# Altium PCB logi-edu.PcbDoc
Units mil, origin at the board's own origin, x right, y up, seen from the top; angles counter-clockwise.
Board outline 3607 x 2026 mil, 4 copper layers (Top Layer, Mid-Layer 1, Mid-Layer 2, Bottom Layer); 57 components, 59 nets, 300 pads, 107 vias.
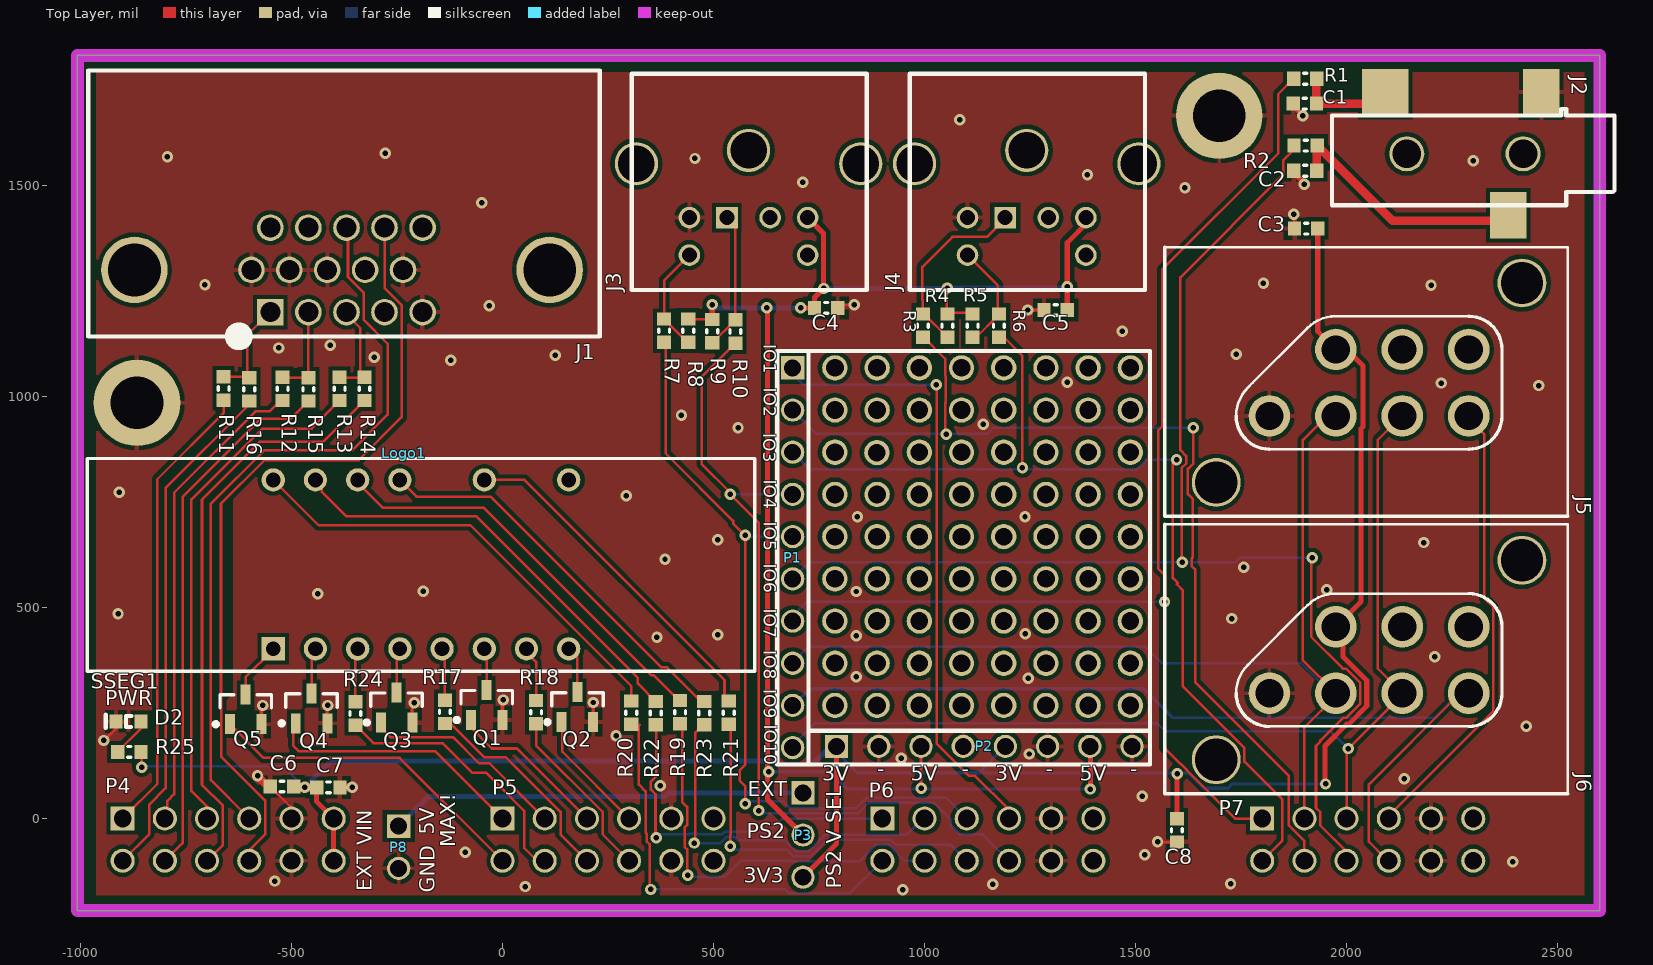
[diagram p0: Top Layer view]
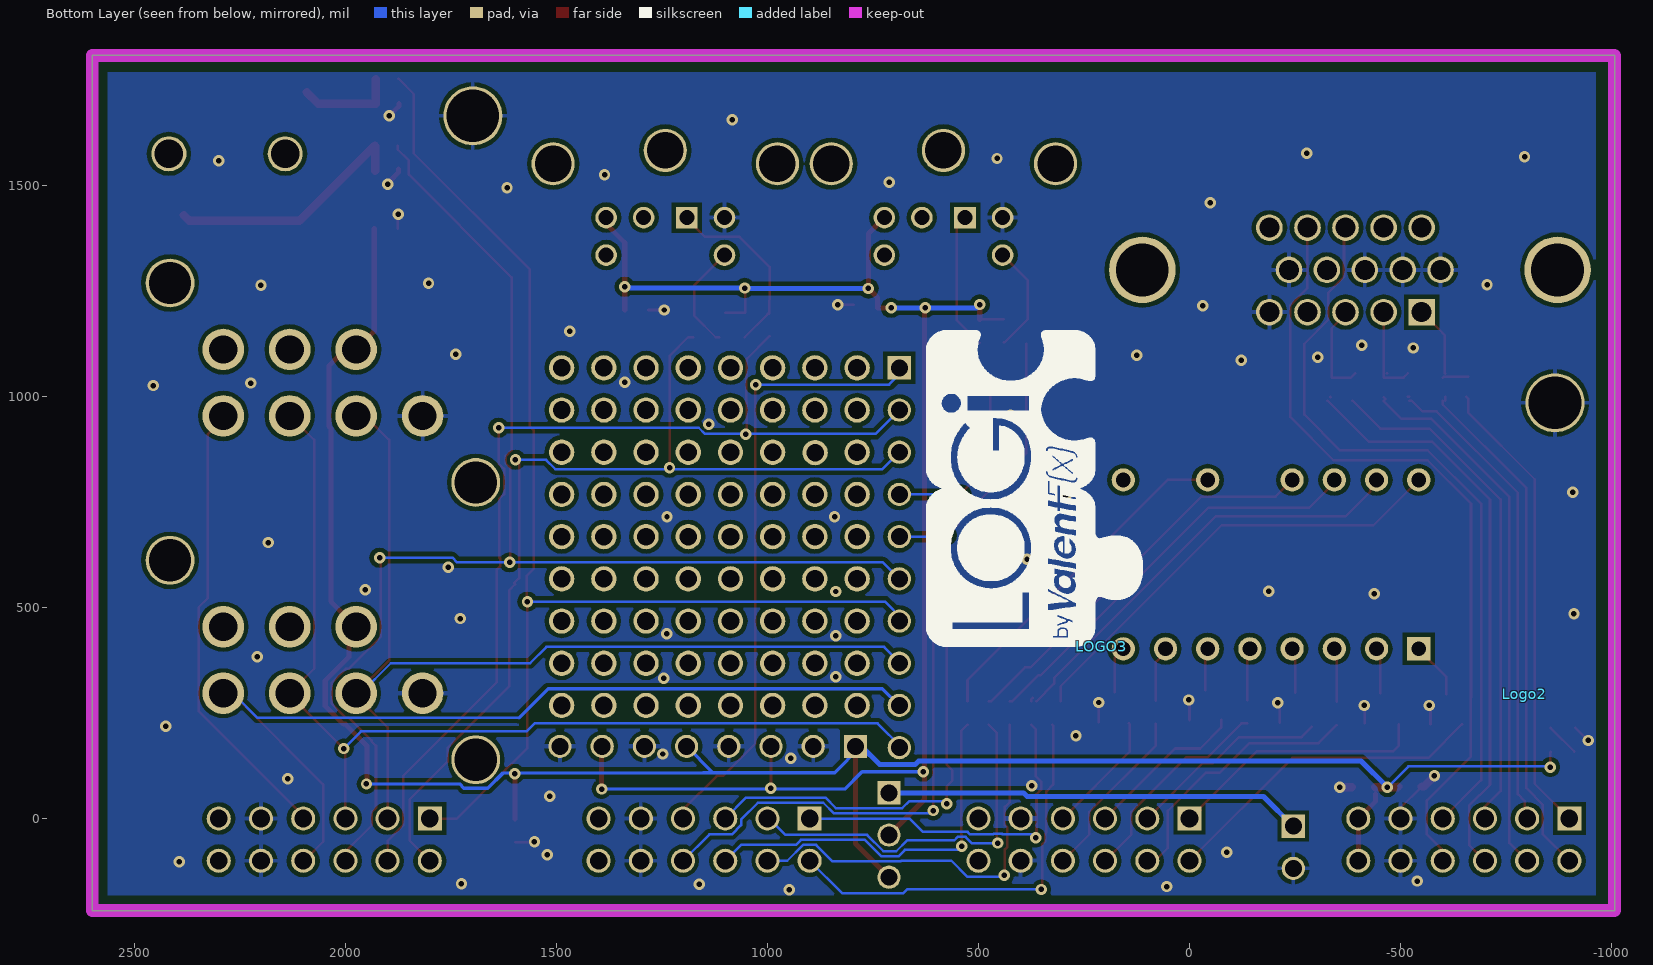
[diagram p1: Bottom Layer view, seen from below]
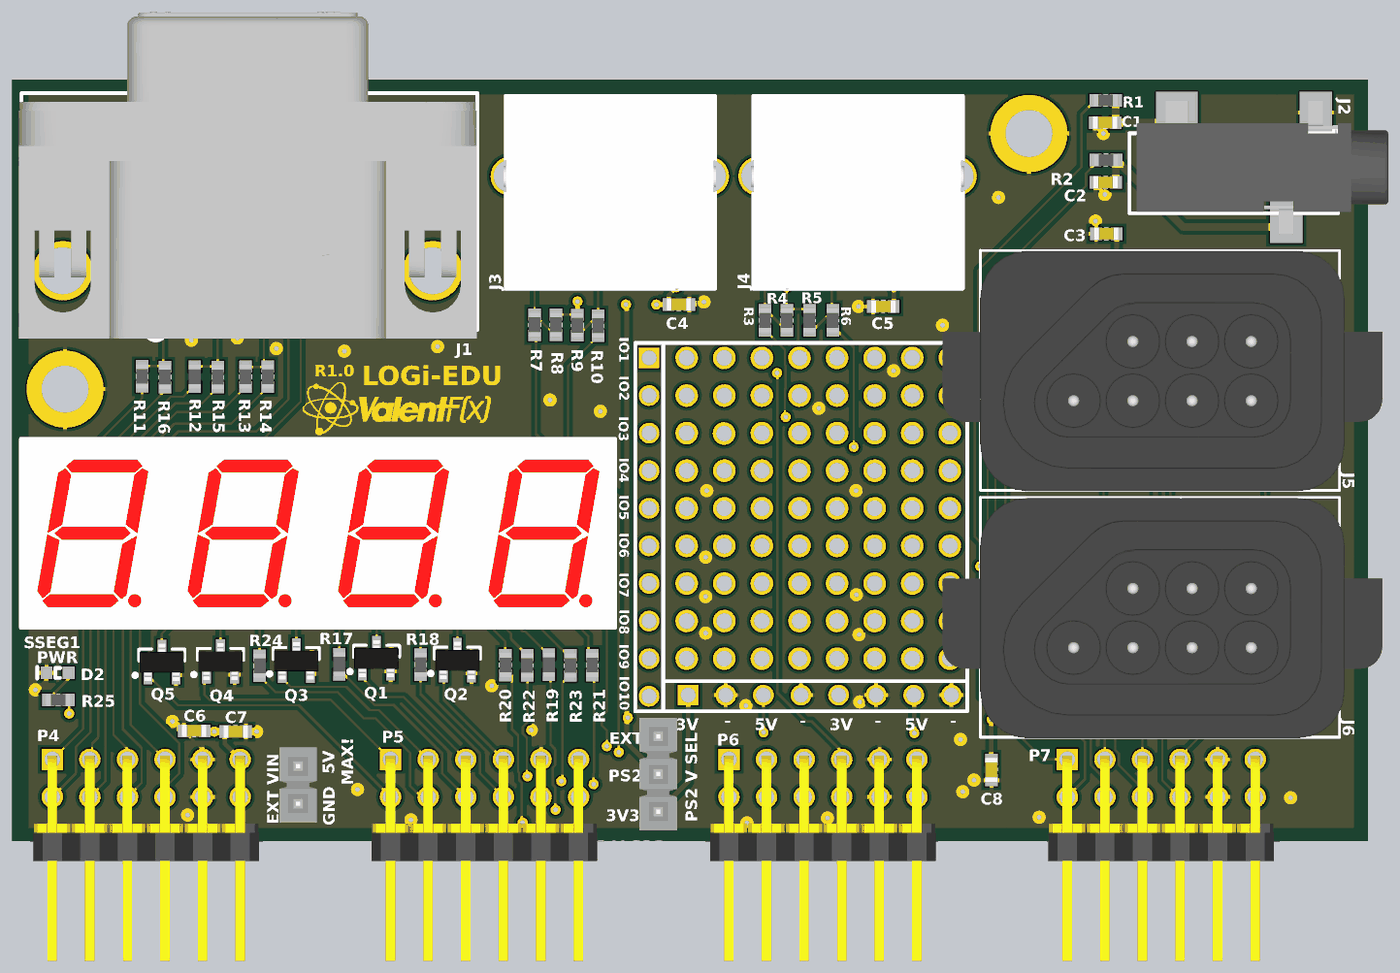
[diagram p2: 3D render of the assembled board from above, using the file's embedded part models]

## Layer stack, top to bottom
Top Solder: solder mask 0.4, Solder Resist, Dk 3.5
Top Layer: signal copper 1.4
Dielectric1: dielectric 12.6, FR-4, Dk 4.8
Mid-Layer 1: signal copper 1.4
Dielectric2: dielectric 12.6, FR-4, Dk 4.8
Mid-Layer 2: signal copper 1.4
Dielectric3: dielectric 12.6, FR-4, Dk 4.8
Bottom Layer: signal copper 1.4
Bottom Solder: solder mask 0.4, Solder Resist, Dk 3.5

## Board outline
-1007,-218 2600,-218 2600,1808 -1007,1808

## Design rules (kind name [scope] priority, off if disabled: settings)
Clearance Poly [InPoly] p1: gap=10
Clearance [All] p2: gap=6
ComponentClearance LEDS+Mounts [(HasFootprint('LTM-450')) vs (HasFootprint('LED T1-3/4 GREEN - 0.45" STANDOFF') OR HasFootprint('LED T1-3/4 RED -  0.45" STANDOFF'))] p1: gap=0 collisioncheckmode=3 verticalgap=0 showdistances=FALSE
ComponentClearance ComponentClearance_1 [OnLayer('Mechanical 1')] p2: gap=0 collisioncheckmode=3 verticalgap=0 showdistances=FALSE
ComponentClearance [All] p3: gap=10 collisioncheckmode=3 verticalgap=10 showdistances=FALSE
Height [All] p1: minheight=0 maxheight=1500 prefheight=500
HoleSize [All] p1: absolutevalues=TRUE maxlimit=250 minlimit=1 maxpercent=80.000 minpercent=20.000
HoleToHoleClearance [All] p1: gap=2 allowstackedmicrovias=TRUE
MinimumSolderMaskSliver [All] p1: minsoldermaskwidth=0
PlaneClearance [All] p1: clearance=10
PolygonConnect via [isvia] p1: connectstyle=Direct reliefconductorwidth=10 reliefentries=4 polygonreliefangle="90 Angle" airgapwidth=10
PolygonConnect PolygonConnect_1 [All] p2: connectstyle=Relief reliefconductorwidth=10 reliefentries=4 polygonreliefangle="90 Angle" airgapwidth=10
RoutingVias [All] p1: holewidth=13 width=27 viastyle="Through Hole" minholewidth=13 minwidth=27 maxholewidth=13 maxwidth=27
SilkToSilkClearance [All] p1: silktosilkclearance=0
SilkToSolderMaskClearance SilkscreenOverComponentPads [IsPad] p1: minsilkscreentomaskgap=0 clearancetoexposedcopper=TRUE
SolderMaskExpansion SolderMaskExpansion_1 [ISVIA] p1: expansion=-100
SolderMaskExpansion [All] p2: expansion=4
Width [All] p1: maxlimit=20 minlimit=6 preferedwidth=12
21 further rules are at their usual default settings.

## Classes and differential pairs
component class logi-edu-top: Logo1 LOGO2 Logo2 LOGO3 Screw1 Screw2 STDOFF1 STDOFF2
component class logi-edu: C1 C2 C3 C4 C5 C6 C7 C8 D2 J1 J2 J3 J4 J5 J6 P1 P2 P3 P4 P5 P6 P7 P8 Q1 Q2 Q3 Q4 Q5 R1 R2 R3 R4 R5 R6 R7 R8 R9 R10 R11 R12 R13 R14 R15 R16 R17 R18 R19 R20 R21 R22 R23 R24 R25 SSEG1
component class ANALOG_IO: C53

## Components (designator, comment, footprint, x,y, rotation, side; value= is the part's Value field where it differs from the comment)
C1 ".1uF" C0603 1901,1694 r180 top (schematic designator C10)
C2 ".1uF" C0603 1902,1535 r180 top (schematic designator C9)
C3 ".1uF" C0603 1904,1398 r180 top (schematic designator C8)
C4 ".1uF" C0603 767,1210 r180 top (schematic designator C5)
C5 ".1uF" C0603 1310.56,1205 r0 top (schematic designator C6)
C6 "4.7uF" C0603 -522.44,76 r180 top (schematic designator C1)
C7 ".1uF" C0603 -412.44,74 r0 top (schematic designator C2)
C8 ".1uF" C0603 1598,-28 r270 top (schematic designator C7)
D2 "598-8010-107F" "LED_0603 - RED" -886,230 r180 top
J1 "VGA" 1-1734530-1 -550,1200 r180 top locked
J2 "SJ-3523-SMT" SJ-3523-SMT 2556,1575 r0 top (schematic designator J6)
J3 "PS/2" "MD-60S - PS/2" 583,1335 r180 top (schematic designator J2)
J4 "PS/2" "MD-60S - PS/2" 1242,1335 r180 top (schematic designator J3)
J5 "450-32360" "NES - 450-32360" 1817,954 r90 top locked
J6 "450-32360" "NES - 450-32360" 1817,297 r90 top locked (schematic designator J4)
Logo1 "Valent Logo 500" VALENTFX_500-SolderMask -234,866 r0 top (schematic designator Logo4)
Logo2 "Valent Logo 1000" ValentFX_1000-SolderMask -793,295 r90 bottom (schematic designator Logo1)
LOGO3 "LOGI-750" LOGI-750-SILK 209,407 r90 bottom
P1 "Header10" "HEADER_10_40_100THRU SIP" 687.56,1068 r270 top (schematic designator P6)
P2 "Header8" "HEADER_8_40_100THRU SIP" 791.56,171 r0 top (schematic designator P5)
P3 "Header3 Male" "HDR - PRPC003SAAN-RC" 712,61 r270 top (schematic designator P8)
P4 "MTSW-106-07-G-D-130-RA" "PMOD HEADER - Male"#1 -900,0 r180 top locked (schematic designator P1)
P5 "MTSW-106-07-G-D-130-RA" "PMOD HEADER - Male"#2 250,-50 r180 top (schematic designator P2)
P6 "MTSW-106-07-G-D-130-RA" "PMOD HEADER - Male"#2 1150,-50 r180 top (schematic designator P3)
P7 "MTSW-106-07-G-D-130-RA" "PMOD HEADER - Male"#2 2050,-50 r180 top (schematic designator P4)
P8 "Header2 - Male" "HDR - PRPC002SAAN-RC" -246,-18 r270 top (schematic designator P7)
Q1 "DMN65D8L-7" SOT-23 -37.44,269 r90 top (schematic designator Q4)
Q2 "DMN65D8L-7" SOT-23 177.56,264 r90 top (schematic designator Q5)
Q3 "DMN65D8L-7" SOT-23 -251,263 r90 top
Q4 "DMN65D8L-7" SOT-23 -452.44,261 r90 top (schematic designator Q2)
Q5 "DMN65D8L-7" SOT-23 -608.44,259 r90 top (schematic designator Q1)
R1 "1k" R0603 1902,1753 r0 top (schematic designator R17)
R2 "1k" R0603 1903,1594.44 r0 top (schematic designator R16)
R3 "220" R0603 996,1168 r90 top (schematic designator R20)
R4 "10k" R0603 1054,1168 r90 top (schematic designator R18)
R5 "10k" R0603 1114,1168 r90 top (schematic designator R19)
R6 "220" R0603 1176,1168 r90 top (schematic designator R21)
R7 "220" R0603 383,1156 r90 top (schematic designator R25)
R8 "10k" R0603 440,1156 r90 top (schematic designator R23)
R9 "10k" R0603 497,1155 r90 top (schematic designator R22)
R10 "220" R0603 552,1154 r90 top (schematic designator R24)
R11 "100" R0603 -661,1019 r90 top (schematic designator R2)
R12 "100" R0603 -521,1018 r90 top (schematic designator R3)
R13 "100" R0603 -386,1018 r90 top (schematic designator R5)
R14 "220" R0603 -327,1018 r90 top (schematic designator R6)
R15 "220" R0603 -459.8,1017.06 r90 top (schematic designator R4)
R16 "220" R0603 -600,1017 r90 top (schematic designator R1)
R17 "100" R0603 -136.44,253 r270 top (schematic designator R14)
R18 "100" R0603 79.56,252 r270 top (schematic designator R15)
R19 "100" R0603 421,252 r270 top (schematic designator R11)
R20 "100" R0603 305,251 r270 top (schematic designator R7)
R21 "100" R0603 536,251 r270 top (schematic designator R12)
R22 "100" R0603 363,250 r270 top (schematic designator R9)
R23 "100" R0603 478,250 r270 top (schematic designator R10)
R24 "100" R0603 -348.44,249 r270 top (schematic designator R8)
R25 "220" R0603 -884,158 r0 top (schematic designator R13)
SSEG1 "7SEG" "LED - SSEG - LTC-4727JR" -543.2,402.33 r0 top locked

## Footprints (in the part's own frame and the unit in brackets; to place one, negate y for a bottom-side part, rotate by r counter-clockwise, add the part's x,y. Pads: shape width x height; smd on the part's side, far side on the other; paste and mask are expansions set on the pad)
1-1734530-1 [mm] "VGA DB15 HD connector female"
  rect 1.6x1.6 hole 1.2: 1(0,0)
  round 1.6 hole 1.2: 2(-2.29,0) 3(-4.58,0) 4(-6.87,0) 5(-9.16,0) 6(1.14,-2.54) 7(-1.14,-2.54) 8(-3.42,-2.54) 9(-5.7,-2.54) 10(-7.98,-2.54) 11(0,-5.08) 12(-2.29,-5.08) 13(-4.58,-5.08) 14(-6.87,-5.08) 15(-9.16,-5.08)
  round 4 hole 3.18: X(-16.81,-2.54) X(8.18,-2.54)
  silkscreen extent -19.82,-14.54 10.96,1.54, body extent -19.79,-20.01 11.16,2.04, height 12.25
C0603 [mm] "0603 Generic"
  rect 0.8x0.85 smd: 1(-0.7,0) 2(0.7,0)
  silkscreen extent -0.1,-0.33 0.1,0.33, body extent -0.8,-0.42 0.82,0.4, height 0.46
"HDR - PRPC002SAAN-RC" [mil]
  rect 55x55 hole 40: 1(0,0)
  round 55 hole 40: 2(100,0)
  body extent -50,-50 150,50, height 205
"HDR - PRPC003SAAN-RC" [mil]
  rect 55x55 hole 40: 1(0,0)
  round 55 hole 40: 2(100,0) 3(200,0)
  body extent -50,-50 250,50, height 205
"HEADER_8_40_100THRU SIP" [mil]
  rect 55x55 hole 40: 1(0,0)
  round 55 hole 40: 2(100,0) 3(200,0) 4(300,0) 5(400,0) 6(500,0) 7(600,0) 8(700,0)
"HEADER_10_40_100THRU SIP" [mil] "HEADER 100 MIL PITCH"
  rect 55x55 hole 40: 1(0,0)
  round 55 hole 40: 2(100,0) 3(200,0) 4(300,0) 5(400,0) 6(500,0) 7(600,0) 8(700,0) 9(800,0) 10(900,0)
"LED - SSEG - LTC-4727JR" [mil] "LED - SSEG - LTC-4727JR"
  rect 55x55 hole 35: 1(0,0)
  round 55 hole 35: 2(100,0) 3(200,0) 4(300,0) 5(400,0) 6(500,0) 7(600,0) 8(700,0) 9(700,400) 11(500,400) 13(300,400) 14(200,400) 15(100,400) 16(0,400)
  silkscreen extent -441,-53 1141,451, body extent -441,-53 1141,451, height 276
"LED_0603 - RED" [mm] "LED_0603"
  rect 0.8x0.85 smd: A(-0.75,0) C(0.75,0)
  silkscreen extent -0.18,-0.41 1.37,0.38, body extent -0.8,-0.4 0.8,0.4, height 0.75
LOGI-750-SILK [mil]
  silkscreen extent 0,-98 750,413
"MD-60S - PS/2" [mm]
  rect 1.3x1.3 hole 0.9: 1(1.3,-2.26)
  round 1.3 hole 0.9: 2(-1.3,-2.26) 3(3.56,-2.26) 4(-3.56,-2.26) 5(3.56,0) 6(-3.56,0)
  round 2.6 hole 2.2: x(-6.75,-5.5) x(0,-6.3) x(6.75,-5.5)
  silkscreen extent -7.11,-10.92 7.04,2.1, body extent -7.17,-11 7.17,2.1, height 13.3
"NES - 450-32360" [mm] "NES Controller Socket"
  round 2.5 hole 1.7: 1(0,0) 2(0,-4) 3(0,-8) 4(0,-12) 5(4,-12) 6(4,-8) 7(4,-4)
  round 2.94 hole 2.54 paste+0: 8(-4,3.2) 9(8,-15.2)
  silkscreen extent -6.04,-17.96 10.16,6.3, body extent -6.12,-20.85 10.13,8.86, height 17.61
"PMOD HEADER - Male"#1 [mil] "68021-212HLF"
  rect 57x57 hole 42: 1(0,0)
  round 57 hole 42: 2(-100,0) 3(-200,0) 4(-300,0) 5(-400,0) 6(-500,0) 7(0,100) 8(-100,100) 9(-200,100) 10(-300,100) 11(-400,100) 12(-500,100)
  body extent -550,-10 50,536, height 225
"PMOD HEADER - Male"#2 [mil] "68021-212HLF"
  rect 57x57 hole 42: 1(250,-50)
  round 57 hole 42: 2(150,-50) 3(50,-50) 4(-50,-50) 5(-150,-50) 6(-250,-50) 7(250,50) 8(150,50) 9(50,50) 10(-50,50) 11(-150,50) 12(-250,50)
  body extent -300,-60 300,486, height 225
R0603 [mm] "0603 Generic"
  rect 0.8x0.85 smd: 1(-0.7,0) 2(0.7,0)
  silkscreen extent -0.1,-0.33 0.1,0.33, body extent -0.81,-0.41 0.81,0.41, height 0.46
SJ-3523-SMT [mm] "3.5MM Stereo Audio Jack"
  rect 2.2x2.8 smd: 1(-2.4,3.7) 3(-4.4,-3.7)
  rect 2.8x2.8 smd: 2(-11.8,3.7)
  round 2.108 hole 1.727 unplated: H1(-3.5,0) H2(-10.5,0)
  silkscreen extent -15,-3.1 2,2.7, body extent -14.52,-4.5 2.48,4.5, height 5.04
SOT-23 [mm] "SOT-23"
  rect 1.2x0.6 smd: 1(-0.9,0.95) 2(-0.9,-0.95) 3(0.9,0)
  silkscreen extent -1.02,-1.55 0.87,1.92, body extent -1.27,-1.5 1.23,1.5, height 1.07
VALENTFX_500-SolderMask [mil]
ValentFX_1000-SolderMask [mil]

## Part data
C1 C2 C3 C4 C5 C7 C8: library part "C0603 - GRM188R71H104KA93D", "0.1uF 50volts X7R 10% MLCC SMD/SMT 0603"
C6: library part "C0603 - GRM188F51A475ZE20D", "4.7uF 10volts Y5V +80-20% (MLCC) - SMD/SMT 0603"
D2: library part "LED0603 - 598-8010-107F", "LED ALINGAP RED CLEAR 0603 SMD"
J1: library part "VGA - 1-1734530-1", "CONN HD D-SUB RCPT R/A 15POS"
J2: "CONN AUDIO JACK 3.5MM STEREO SMD"
J3 J4: library part "Con - D-60S", "CONN MINIDIN RECPT UNSHIELD 6POS - PS/2 mouse - keybaord"
J5 J6: "NES CONTROLLER SOCKET"
P1: "Header 10 pin"
P2: "Header 8 pin"
P3: library part "HDR - PRPC003SAAN-RC", "3POS Male CONN HEADER .100\" SNGL STR"
P4 P5 P6 P7: library part "P-MOD - MTSW-106-07-G-D-130-RA", "Samtec Male Conn Unshrouded Header HDR 12 POS 2.54mm Solder RA Thru-Hole"
P8: library part "HDR - PRPC002SAAN-RC", "2POS male CONN HEADER .100\" SNGL STR"
Q1 Q2 Q3 Q4 Q5: library part "NMOS - DMN65D8L-7", "MOSFET N-CH 60V 310MA SOT23"
R1 R2: library part ERJ-3EKF1001V, "RES 1.00K OHM 1/10W 1% 0603 SMD"
R3 R6 R7 R10 R14 R15 R16 R25: library part "R0603 - ERJ-3EKF2200V", "220 - thick Film Resistors - SMD 0603 220ohms 1% Tol"
R4 R5 R8 R9: library part "R0603 - CRCW060310K0FKEA", "10k Thick Film Resistors - SMD 1/10watt 10Kohms 1%"
R11 R12 R13 R17 R18 R19 R20 R21 R22 R23 R24: library part "R0603 - CRCW0603100RFKEA", "100 ohms 1% Thick Film Resistors - SMD 1/10watt"
SSEG1: library part "LED - SSEG - LTC-4727JR", "LED Displays & Accessories 4 Digit, Red Low Current"

## Free pads (board coordinates)
  round 205 / inner round 140 / far side round 140 hole 125: MT1(1698,1665) MT2(-866,985)
  round 60 hole 42: X(787.56,268) X(787.56,368) X(787.56,468) X(787.56,568) X(787.56,668) X(787.56,768) X(787.56,868) X(787.56,968) X(787.56,1068) X(887,867) X(887.56,268) X(887.56,368) X(887.56,468) X(887.56,568) X(887.56,668) X(887.56,768) X(887.56,968) X(887.56,1068) X(987.56,268) X(987.56,368) X(987.56,468) X(987.56,568) X(987.56,668) X(987.56,768) X(987.56,868) X(987.56,968) X(987.56,1068) X(1087.56,268) X(1087.56,368) X(1087.56,468) X(1087.56,568) X(1087.56,668) X(1087.56,768) X(1087.56,868) X(1087.56,968) X(1087.56,1068) X(1187.56,268) X(1187.56,368) X(1187.56,468) X(1187.56,568) X(1187.56,668) X(1187.56,768) X(1187.56,868) X(1187.56,968) X(1187.56,1068) X(1287.56,268) X(1287.56,368) X(1287.56,468) X(1287.56,568) X(1287.56,668) X(1287.56,768) X(1287.56,868) X(1287.56,968) X(1287.56,1068) X(1387.56,268) X(1387.56,368) X(1387.56,468) X(1387.56,568) X(1387.56,668) X(1387.56,768) X(1387.56,868) X(1387.56,968) X(1387.56,1068) X(1487.56,268) X(1487.56,368) X(1487.56,468) X(1487.56,568) X(1487.56,668) X(1487.56,768) X(1487.56,868) X(1487.56,968) X(1487.56,1068)

## Via types
v1: diameter 27, hole 13, Top Layer to Bottom Layer, 107 vias

## Nets (pads, with @x,y where several pads share a name; then routed paths per layer and width w, separated by ;. In a path a pad name is that pad's centre, name@x,y a point inside that pad or via, vN(x,y) a via of type N, cw(c..) or ccw(c..) an arc to the next point about the centre after c; other vN are vias at no path point)
3V3: C3.1 C6.1 C7.1 C8.1 J5.7 J6.7 P2.1 P2.5 P3.3 P4.6 P4.12 R25.2 | length 5174.9
  Top Layer w6: R25.2 -855,156.56 v1(-855,122)
  Top Layer w12: C7.1@-441,58.44 -441,41 P4.6 ; P4.6@-403.44,-5 -400,-8.44 P4.12 ; P3.3 791.56,-59.44 P2.1 ; C8.1 1598,105 v1(1599,106) ; C3.1 1931.56,1154.4 J5.7 ; v1@1948.56,82 1948.56,172 2000.35,223.79 2004.81,223.79 2047.69,266.67 2047.69,327.33 1991.56,383.46 J6.7@1991.56,442 ; J6.7 2034.56,514.56 2034.56,924.51 2038.69,928.65 2038.69,1072.87 J5.7@1991.56,1120
  Top Layer w20: C6.1 -492.88,74 v1(-468.94,74) C7.1
  Bottom Layer w6: v1(-855,122) -853.5,123.5 -518.44,123.5 v1(-468.94,74)
  Bottom Layer w8: P2.1@779.56,170 840.56,109 1129.56,109 ; P2.5 1129.56,109 ; v1(1950,82) 1729.48,82 1719.13,71.65 1662.9,71.65 1626.55,108 1152.77,108 1151.77,109 1129.56,109
  Bottom Layer w12: v1(-468.94,74) -406.44,136.5 641.56,136.5 650.06,128 734,128 777,171 P2.1
EXT_VIN: P3.1 P8.1 | length 990.7
  Bottom Layer w12: P8.1 -175.5,52.5 384.56,52.5 393.06,61 P3.1
GND: C1.2 C2.2 C3.2 C4.1 C5.1 C6.2 C7.2 C8.2 D2.C J1.5 J1.6 J1.7 J1.8 J1.10 J2.1 J3.3 J4.3 J5.1 J6.1 P2.2 P2.4 P2.6 P2.8 P4.5 P4.11 P5.5 P5.11 P6.5 P6.11 P7.5 P7.11 P8.2 pad.MT1 pad.MT2 Q1.2 Q2.2 Q3.2 Q4.2 Q5.2 | length 686.4
  Top Layer w6: v1(-945,185) -944.53,185 D2.C@-914.53,215 ; Q5.2 -571.04,265.4 v1(-568.44,268) ; C6.2@-550.44,76 -500,25.56 P4.5 ; Q4.2 -415.04,267.4 v1(-414.44,268) ; v1(-356.44,74) v1@-353.44,77 ; Q3.2 -213.6,269.84 v1(-209.44,274) ; Q1.2 -0.04,279.4 v1(1.56,281) ; v1(214.56,275) 214.96,274.6 Q2.2 ; C4.1@795.12,1217 v1(833.56,1217) ; v1(1244.56,1205) C5.1 ; v1(1552,-55) 1552.56,-55.56 C8.2 ; v1(1875,1432) 1876.44,1430.56 C3.2
  Top Layer w12: C1.2 1873.44,1687.56 v1(1896,1665) ; C2.2@1874.44,1538.44 1874.44,1530.56 1891,1514 1900,1505 v1(1900,1503)
  Top Layer w20: v1(-580.44,101) -555.44,76 -550.44,76 C6.2 ; C7.2 v1(-356.44,74)
  other v1: 948,-169 54,-161 1162,-156 1725,-154 -540,-148 2394,-102 1522,-86 -88,-80 1516,53 374,78 2136.56,94 945,143 1248,153 269,196 2426,219 1246,332 838,336 2209,383 366,430 838,433 510,436 1239,438 1728,474 -911,485 -438,533 838,538 -188,539 1952.56,542 1756,595.9 385,614 2183,654 510,661 841,715 1238,715 293,765 -908,773 558,926 1139,934 424,956 2455,1026 2224,1032 1338,1034 -123,1086 -304,1093 125,1098 1738.26,1099.87 -530,1115 -408,1121 1468,1155 -31,1215 2200,1264 -705,1265 1803,1268 -49,1458.65 1617,1495 711,1508 1386,1525 2300,1559 456,1564 -793.8,1568 -278,1576 1083,1656
IO1: P1.1 P6.4 | length 1482.5
  Top Layer w6: v1(1028,1028) 1028.5,1027.5 1028.5,177.5 1105,101 1120,101 1200,21 P6.4
  Bottom Layer w6: P1.1@670.56,1069 711.56,1028 v1(1028,1028)
NES1_DAT: J5.4 P7.4 | length 1062.9
  Top Layer w6: P7.4 2100,7.44 2347.65,255.09 2347.65,500.69 2326.66,521.68 2326.66,905.9 2325.66,904.9 2325.66,910.9 J5.4@2298.56,938
NES2_DAT/IO9: J6.4 P1.9 P7.10 | length 2147.8
  Top Layer w6: P7.10@2093.56,-96 2052.56,-55 2052.56,81 2258.56,287 J6.4@2275.56,287
  Bottom Layer w6: 1588.56,238.79 2208.35,238.79 J6.4@2264.56,295
  Bottom Layer w8: P1.9 727.56,308 1519.35,308 1588.56,238.79
NES_CLK/IO8: J5.2 J6.2 P1.8 P7.2 | length 2377.1
  Top Layer w6: P7.2 1900,216.44 J6.2@1975.56,292 ; J5.2@1950.56,948 1947.56,948 1896.5,896.94 1896.5,374.98 J6.2
  Bottom Layer w6: P1.8@681.56,365 723.56,407 1523.56,407 1562.56,368 1892.56,368 J6.2@1964.56,296
NES_LAT/IO10: J5.3 J6.3 P1.10 P7.3 | length 2390.3
  Top Layer w6: P7.3 v1@2000,161.44 ; v1@2004.06,165.5 J6.3@2114.56,276 ; J5.3@2110.56,934 2073.75,897.19 2073.75,355.21 J6.3 ; J6.3@2115.56,275 J6.3@2134.76,294.2
  Bottom Layer w6: P1.10@682.56,169 739.06,225.5 1551.45,225.5 1570.56,206.39 1963.17,206.39 v1(2003.56,166)
NetC1_1: C1.1 J2.2 R1.2 | length 232.9
  Top Layer w6: R1.2@1929.56,1752 R1.2
  Top Layer w20: R1.2@1928.56,1752 C1.1 2064.76,1694 J2.2
NetC2_1: C2.1 J2.3 R2.2 | length 591.2
  Top Layer w20: C2.1 1929.56,1593.44 R2.2 2108.67,1416.33 2369.77,1416.33 J2.3
NetD2_A: D2.A R25.1 | length 80.2
  Top Layer w6: R25.1 -911.56,158.91 D2.A@-855.47,215
NetJ1_1: J1.1 R11.2 R16.2 | length 230.4
  Top Layer w6: R11.2 -602,1046.56 R16.2 ; R16.2@-605.86,1054.56 -604.86,1055.56 -604.86,1145.14 -600,1150 J1.1
NetJ1_2: J1.2 R12.2 R15.2 | length 217.6
  Top Layer w6: R12.2@-517.09,1054.62 -507.46,1045 -460,1045 -460,1199.84 J1.2 ; R15.2@-468.05,1054.62 R15.2@-467.05,1055.62
NetJ1_3: J1.3 R13.2 R14.2 | length 235.6
  Top Layer w6: R13.2@-392.2,1054.62 -381.58,1044 -337,1044 -337,1162 J1.3@-378,1203
NetJ3_1: J3.1 R9.1 R10.2 | length 328.2
  Top Layer w6: R9.1 497.88,1127.44 R10.2 552,1403.8 J3.1
NetJ3_5: J3.5 R7.2 R8.1 | length 256.1
  Top Layer w6: R8.1 438.12,1128.44 R7.2 383,1275.16 J3.5
NetJ4_1: J4.1 R3.2 R4.1 | length 438.8
  Top Layer w6: R4.1 998.88,1195.56 R3.2 996,1228 995,1229 995,1307 1066,1378 1148,1378 1190.82,1420.82 J4.1
NetJ4_5: J4.5 R5.1 R6.2 | length 253.4
  Top Layer w6: J4.5 1173,1263.84 1173,1191 1122.44,1140.44 R5.1
NetQ1_3: Q1.3 SSEG1.6 | length 92.1
  Top Layer w6: SSEG1.6@-43.44,394 -37.44,388 Q1.3
NetQ2_3: Q2.3 SSEG1.8 | length 106
  Top Layer w6: SSEG1.8@159.56,398 177.56,380 Q2.3
NetQ3_3: Q3.3 SSEG1.4 | length 104.7
  Top Layer w6: Q3.3 -251,392.44 SSEG1.4@-243.44,400
NetQ4_3: Q4.3 SSEG1.2 | length 107.5
  Top Layer w6: Q4.3 -452.44,393 -445.44,400 SSEG1.2@-445.44,401
NetQ5_3: Q5.3 SSEG1.1 | length 133.9
  Top Layer w6: Q5.3 -608.44,335 SSEG1.1@-542.44,401
NetR17_1: R17.1 SSEG1.5 | length 127.8
  Top Layer w6: SSEG1.5@-144.44,405 -136.44,397 R17.1
NetR18_1: R18.1 SSEG1.7 | length 124
  Top Layer w6: SSEG1.7@56.56,394 79.56,371 R18.1
NetR19_1: R19.1 SSEG1.14 | length 989.7
  Top Layer w6: SSEG1.14 -343.2,796.2 -283,736 -44,736 352,340 358.02,340 420.46,277.56 R19.1@425.5,277.56
NetR20_1: R20.1 SSEG1.16 | length 1085.9
  Top Layer w6: SSEG1.16 -435.87,695 -76,695 305,314 R20.1
NetR21_1: R21.1 SSEG1.11 | length 816.1
  Top Layer w6: SSEG1.11 51.67,802.33 526,328 R21.1@526,277.56
NetR22_1: R22.1 SSEG1.15 | length 1049
  Top Layer w6: SSEG1.15 -427.87,787 -427.87,773.87 -370,716 -62,716 320.56,333.44 320.56,320 R22.1 ; R22.1@371.22,285.78 375.25,281.75 R22.1@375.25,277.56
NetR23_1: R23.1 SSEG1.13 | length 936.3
  Top Layer w6: SSEG1.13 -203.87,763 -28,763 377,358 390.27,358 470.71,277.56 R23.1@475.75,277.56
NetR24_1: R24.1 SSEG1.3 | length 130.3
  Top Layer w6: R24.1 -348.44,404 SSEG1.3@-346.44,406
PS2_1_CLK/IO3: P1.3 P7.7 R6.1 | length 2353.8
  Top Layer w6: R6.1 1188,1140.44 1232,1096.44 v1(1232,831) ; v1(1597,850) 1588,841 1588,616.82 1588.5,616.32 1588.5,569.5 1600,558 ; 1597.5,555.5 1612.14,540.86 1612.14,312.97 1757.89,167.22 1757.89,135.11 1847,46 1847,-53 P7.7
  Bottom Layer w6: P1.3 727.56,828 1502.71,828 1524.71,850 v1(1597,850)
PS2_1_DAT/IO2: P1.2 P7.8 R3.1 | length 2382.5
  Top Layer w6: R3.1@995,1143 1048.56,1089.44 1048.56,1049.4 1050.5,1047.46 1050.5,986.1 1048.56,984.15 1048.56,913.44 v1(1051,911) ; v1(1637,926) 1637,841.21 1624.14,828.35 1624.14,768.82 1635,757.96 1635,617.82 1633.5,616.32 1633.5,597.68 1641,590.18 1641,323.28 1862.5,101.78 1862.5,-15.53 1900,-53.03 P7.8
  Bottom Layer w6: P1.2 744.06,911.5 1148.32,911.5 1162.82,926 v1(1637,926)
PS2_2_CLK/IO5: P1.5 P6.3 R7.1 | length 1869.6
  Top Layer w6: R7.1@386.73,1124.71 386.73,865.27 546.5,705.5 546.5,699.5 v1(575,671) 575,127.21 562,114.21 562,89.79 575,76.79 v1(575,35) ; P6.3@1099.28,-0.72 P6.3@1107.56,-9
  Bottom Layer w6: v1(575,35) 581.5,41.5 663.77,41.5 680.77,24.5 837.8,24.5 862.8,49.5 1050.5,49.5 P6.3 ; v1(575,671) 578,668 P1.5
PS2_2_DAT/IO4: P1.4 P6.10 R10.1 | length 2014.7
  Top Layer w6: R10.1 472,1046.44 472,840 540,772 v1(540,768) 607,701 v1(607,19)
  Bottom Layer w6: v1(540,768) P1.4 ; v1(607,19) 613.5,12.5 842.77,12.5 867.77,37.5 1022.5,37.5 1062.5,-2.5 1062.5,-15.53 1084.47,-37.5 1137.5,-37.5 P6.10
PWM1/IO6: P1.6 P7.9 R2.1 | length 3211.4
  Top Layer w6: v1(1611,607) 1609,609 1609,830.18 1619.5,840.68 1619.5,859.32 1606,872.82 1606,1282 1849.69,1525.69 1849.69,1558.9 1875.44,1584.65 R2.1 ; v1(1919,618) 1916.27,615.27 1916.27,430.37 1991.42,355.21 1998.59,355.21 2032.69,321.11 2032.69,272.89 1998.59,238.79 1991.79,238.79 1938,185 1938,182.65 1927.5,172.15 1927.5,25.53 1937.5,15.53 1937.5,-15.99 2000,-78.49 P7.9
  Bottom Layer w6: P1.6 726.56,607 v1(1611,607) 1735.28,607 1746.68,618.4 1918.6,618.4 v1(1919,618)
PWM2/IO7: P1.7 P7.1 R1.1 | length 2931.8
  Top Layer w6: P7.1 1735.96,0 1621.5,114.46 1621.5,115.32 1608.32,128.5 1607.46,128.5 1568.56,167.4 v1(1568.56,514) 1570.06,515.5 1570.06,575.71 1554.06,591.71 1554.06,920.41 1563,929.35 1563,1301 1838,1576 1838,1716.56 R1.1
  Bottom Layer w6: P1.7@680.56,473 721.56,514 v1(1568.56,514)
SEG_CTRL_A1: P5.7 Q5.1 | length 779.9
  Top Layer w6: Q5.1 -566.28,144 -244,144 P5.7
SEG_CTRL_A2: P5.1 Q4.1 | length 652.6
  Top Layer w6: Q4.1@-495.44,224 -495.44,172 -482.44,159 -159,159 P5.1 ; P5.1@-26.44,20 P5.1@-2.44,-4
SEG_CTRL_A3: P5.3 Q1.1 | length 385.1
  Top Layer w6: Q1.1 -74.84,215.4 -25.44,166 34,166 P5.3 ; P5.3@200.56,7 P5.3@202.56,5
SEG_CTRL_A4: P5.4 Q2.1 | length 292.5
  Top Layer w6: Q2.1@143.56,226 141.56,224 141.56,158.44 P5.4
SEG_CTRL_L: P5.2 Q3.1 | length 479.3
  Top Layer w6: Q3.1@-289.44,217 -265.44,193 -117.44,193 -55.44,131 -31,131 P5.2
SSEG0_A: P6.8 R19.2 | length 977.7
  Top Layer w6: R19.2@425.5,222.44 425.5,39.53 437.5,27.53 437.5,-15.53 431.5,-21.53 431.5,-67.32 437.5,-73.32 437.5,-132.5 v1(439,-134)
  Bottom Layer w6: v1(439,-134) 443,-138 526,-138 564,-100 683.44,-100 684.94,-101.5 845.47,-101.5 884.47,-62.5 915.53,-62.5 953.03,-100 P6.8
SSEG1_B: P6.7 R20.2 | length 987.9
  Top Layer w6: 325,222.44 323,220.44 323,80.21 339,64.21 339,-33.18 341.5,-35.68 341.5,-54.32 349,-61.82 349,-166 v1(351,-168)
  Bottom Layer w6: v1(351,-168) 669.27,-168 678.77,-177.5 822.5,-177.5 P6.7
SSEG2_C: P6.2 R23.2 | length 893.5
  Top Layer w6: v1(454,-58) 457,-55 457,203.69 R23.2@475.75,222.44
  Bottom Layer w6: v1(454,-58) 516.18,-58 530.68,-43.5 549.32,-43.5 557.32,-51.5 668.88,-51.5 694.88,-77.5 725.12,-77.5 764.12,-38.5 957.5,-38.5 P6.2@1003,7
SSEG3_D: P5.8 R24.2 | length 644.6
  Top Layer w6: R24.2 -306,179 -142,179 -72,109 -39.27,109 51.56,18.17 51.56,-70 95.56,-114 P5.8@95.56,-107 ; P5.8@97.56,-107 P5.8@97.56,-104
SSEG4_E: P5.9 R17.2 | length 505.9
  Top Layer w6: R17.2 -122.88,225.44 -42.44,145 8.03,145 137.5,15.53 137.5,-37.5 P5.9@199,-99 ; P5.9 P5.9@199,-99 ; P5.9@202.56,-99 P5.9@199,-99
SSEG5_F: P6.9 R21.2 | length 901.5
  Top Layer w6: R21.2@526,222.44 541,207.44 541,-37 540,-38 v1(540,-66)
  Bottom Layer w6: v1(540,-66) 548,-74 674.41,-74 689.91,-89.5 730.09,-89.5 769.09,-50.5 920.5,-50.5 932.5,-62.5 1062.5,-62.5 P6.9
SSEG6_G: P6.1 R22.2 | length 838.8
  Top Layer w6: v1(364,-45) 362.5,-43.5 362.5,57.68 351.5,68.68 351.5,87.32 364,99.82 364,211.19 R22.2@375.25,222.44
  Bottom Layer w6: v1(364,-45) 371.5,-37.5 442.68,-37.5 444.68,-35.5 463.32,-35.5 465.32,-37.5 519.71,-37.5 525.71,-31.5 631.5,-31.5 663,0 P6.1
SSEG7_DP: P5.10 R18.2 | length 415.8
  Top Layer w6: R18.2 79.56,173.47 237.5,15.53 237.5,-37.5 P5.10
VDD_PS2: C4.2 C5.2 J3.4 J4.4 P2.3 P2.7 P3.2 R4.2 R5.2 R8.2 R9.2 | length 3758.9
  Top Layer w6: R8.2 496,1183.56 R9.2 ; v1(1054,1257) 1053,1256 1053,1198 R5.2@1100.44,1198
  Top Layer w8: v1@991.56,72.44 P2.3
  Top Layer w12: R9.2 v1(497,1218) ; v1(626,1210) 628,1208 628,45 P3.2 ; v1(707,1210) C4.2 739.44,1234.69 v1(760.75,1256) 760.75,1386.39 J3.4 ; v1@991.56,72.44 v1(992,72) ; C5.2 1338.12,1364.56 J4.4@1388.56,1415 ; P2.7 1393,169.56 v1(1393,70)
  Bottom Layer w8: v1(631,111) 776,111 817,70 v1@992,70 ; v1@994,70 v1(1393,70)
  Bottom Layer w12: v1(497,1218) 505,1210 v1(626,1210) v1(707,1210) ; v1(760.75,1256) 1053,1256 v1(1054,1257) 1335,1257 v1(1338,1260) ; v1(992,72) v1@994,70
VGA_B0: P4.9 R14.1 | length 1376
  Top Layer w6: P4.9 -662.5,-62.5 -662.5,30.5 -712,80 -712,756 -575,893 -424.44,893 R14.1 ; R14.1@-334.28,997.72 -334,998 R14.1@-334,999.44
VGA_B1: P4.3 R13.1 | length 1220.3
  Top Layer w6: P4.3 -699,1 -699,27.12 -737,65.12 -737,756 -569,924 -452.44,924 R13.1
VGA_G0: P4.8 R15.1 | length 1278.2
  Top Layer w6: P4.8 -758,-58 -758,762 -573,947 -502.3,947 R15.1 ; R15.1@-464.3,994 R15.1@-459.8,998.5
VGA_G1: P4.2 R12.1 | length 1132.5
  Top Layer w6: P4.2 -794,6 -794,42.06 -778,58.06 -778,772 -585.31,964.69 -551.9,964.69 -526.15,990.44 R12.1 ; R12.1@-521,999.5 R12.1@-517.09,999.5
VGA_HS: J1.13 P4.4 | length 1780.9
  Top Layer w6: P4.4 -691,91 -691,746 -564.45,872.55 -356.45,872.55 -272,957 -272,1125.06 -329.19,1182.25 -329.19,1246.33 -366.09,1283.23 -366.09,1395.65 J1.13@-375.44,1405
VGA_R0: P4.7 R16.1 | length 1236.7
  Top Layer w6: P4.7@-909.44,-109 P4.7@-900.22,-99.78 ; P4.7 -837.5,-37.5 -837.5,32.5 -798,72 -798,783 -600,981 R16.1 ; R16.1@-605.86,989.44 R16.1@-605.86,999.44
VGA_R1: P4.1 R11.1 | length 1100.6
  Top Layer w6: P4.1 -818,82 -818,804 -661,961 R11.1 -661,994.3 R11.1@-655.86,999.44
VGA_VS: J1.14 P4.10 | length 1892.3
  Top Layer w6: P4.10@-599.44,-109 -599.44,-74.44 -562.5,-37.5 -562.5,43.29 -666.65,147.45 -666.65,285.35 -667,285.69 -667,746 -564,849 -341,849 -239.03,950.97 -239.03,1216.77 -279.53,1257.27 J1.14
pads on no net: J1.4 J1.9 J1.11 J1.12 J1.15 J1.X J2.H1 J2.H2 J3.2 J3.6 J3.x J4.2 J4.6 J4.x J5.5 J5.6 J5.8 J5.9 J6.5 J6.6 J6.8 J6.9 P5.6 P5.12 P6.6 P6.12 P7.6 P7.12 SSEG1.9

## Polygon pours and split planes (outlines as drawn)
GND on Bottom Layer "GND_BOT" (solid, remove dead copper, pour order 4): -962.44,1768 -962.44,-182 2562.56,-182 2562.56,1743 2562.56,1768 -962.44,1768
GND on Top Layer "GND_TOP" (solid, remove dead copper, pour order 3): -962.44,1768 -962.44,-182 2562.56,-182 2562.56,1743 2562.56,1768 -962.44,1768

## Keep-outs
Keep-Out Layer:
  the board outline again, w30

## Silkscreen, mask and mechanical layers (free items; w line width, h text height)
Top Overlay:
  lines w10: 725.06,208 1534.06,208 1534.06,128 ; 727.37,1108 725.06,1105.69 725.06,128 ; 725.06,128 1534.06,128 ; 725.06,128 650.81,128 650.81,1108 1534.06,1108 1534.06,128
  text "IO1" at 608.39,1123.51 h50 r270
  text "IO2" at 608.39,1020.39 h50 r270
  text "IO3" at 607,913 h50 r270
  text "IO4" at 608.39,803.33 h50 r270
  text "IO5" at 608.39,703.49 h50 r270
  text "IO6" at 608.39,603.19 h50 r270
  text "IO7" at 608.39,496.9 h50 r270
  text "IO8" at 608.49,399.19 h50 r270
  text "IO9" at 608.39,306.82 h50 r270
  text "PWR" at -941.28,256.73 h60
  text "IO10" at 609,222 h50 r270
  text "-" at 887.56,88 h60
  text "-" at 1087.56,88 h60
  text "-" at 1287.56,88 h60
  text "-" at 1487.56,88 h60
  text "3V" at 757.56,78 h60
  text "5V" at 967.56,78 h60
  text "3V" at 1167.56,78 h60
  text "5V" at 1367.56,78 h60
  text "EXT" at 581.5,41.5 h60
  text "5V" at -150,-38 h60 r90
  text "PS2" at 579,-58 h60
  text "MAX!" at -100,-68 h60 r90
  text "3V3" at 572,-164 h60
  text "PS2 V SEL" at 815,-166 h60 r90
  text "EXT VIN" at -298,-172 h60 r90
  text "GND" at -149,-176 h60 r90
Top Paste:
  text "PS2 V SEL" at 727,-246 h60
Top Solder:
  text "R1.0" at -203,1019 h60
  text "LOGi-EDU" at -77,996 h100
Bottom Solder:
  text "LOGi-EDU R1.0" at 48,627 h100
  text "V2014.03.18" at 46,550 h100
Mechanical 2:
  lines w10: -1148.33,-141.73 -1129.01,-201.95 ; -1139.01,-201.84 -1119.01,-202.07 ; -1127.09,1750.7 -1106.41,1810.47 ; -1122.1,413.4 -1129.01,-201.95 ; -1116.41,1810.58 -1096.41,1810.36 ; -1113.32,1195.11 -1106.41,1810.47 ; -1108.34,-142.18 -1129.01,-201.95 ; -1087.09,1750.25 -1106.41,1810.47 ; -990.03,-367.91 -989.84,-347.91 ; -930.12,-378.46 -989.94,-357.91 ; -929.75,-338.46 -989.94,-357.91 ; 410.67,-370.81 -989.94,-357.91 ; 1202.39,-378.1 2603,-391 ; 2542.82,-410.45 2603,-391 ; 2543.19,-370.45 2603,-391 ; 2602.91,-401 2603.09,-381
  text "2012.553 (mil)" at -1086,423 h60 r89.36
  text "3593.089 (mil)" at 420.34,-406.89 h60 r359.47
Mechanical 3:
  lines w20: -3266.96,10 -866.96,10 ; -3266.96,2110 5683.04,2110
  text "PCB Fabrication Notes" at -3246.96,2230 h150
  text "Unless otherwise specified, all dimensions are in inches" at -3278,1910 h100
  text "Overall Dimension:  \"  x  \"" at -3278,1810 h100
  text "Finished Thickness:  .062\"" at -3278,1710 h100
  text "Layer Count: 2" at -3278,1610 h100
  text "Min Thru Hole: 13 mil" at -3278,1521 h100
  text "Annular Ring: 7 mil" at -3278,1428 h100
  text "Min Trace/Space: 6 mil" at -3278,1333 h100
  text "Drill Count:" at -3278,1227 h100
  text ".hole_Count" at -2682.96,1227 h100
  text "PAD Count:" at -3278,1127 h100
  text ".pad_Count" at -2682.96,1127 h100
  text "Component Count:" at -3278,1027 h100
  text ".Component_Count" at -2482.96,1027 h100
  text "Via Count:" at -3278,927 h100
  text ".Via_Count" at -2682.96,927 h100
  text "Plating: Gold ENIG" at -3278,705.73 h100
  text "Solder Mask:  Black" at -3278,606 h100
  text "Legend:  White Non-Conductive Ink LPI Process" at -3278,506 h100
  text "RS274-X Gerber Format, 2.5 Leading Zeros Suppressed" at -3278,406 h100
  text "Excellon Drill Format, 2.5 Trailing Zeros Suppressed" at -3278,306 h100
  text "Layer Details" at -3266.96,110 h100
  text "4-Layer Stackup" at -2466.96,110 h100
  text "POLARITY" at -1566.96,110 h100
  text ".GTL - Top Copper" at -3266.96,-90 h100
  text "POSITIVE" at -1566.96,-90 h100
  text ".G1 - Inner Copper (Ground)" at -3266.96,-190 h100
  text "POSITIVE" at -1566.96,-190 h100
  text ".G2 - Inner Copper (VDD)" at -3266.96,-290 h100
  text "POSITIVE" at -1566.96,-290 h100
  text ".GBL - Bottom Copper" at -3266.96,-390 h100
  text "POSITIVE" at -1568,-390.46 h100
  text ".GTO - Top Silkscreen" at -3266.96,-590 h100
  text ".GBO - Bottom Silkscreen" at -3266.96,-690 h100
  text ".GTP - Top Solder Paste" at -3266.96,-790 h100
  text ".GBP - Bottom Solder Paste" at -3266.96,-890 h100
  text ".GTS -  Top Solder Mask" at -3266.96,-990 h100
  text ".GBS - Bottom Solder Mask" at -3266.96,-1090 h100
  text ".GKO - Board Outline" at -3266.96,-1190 h100
  text ".GM1 - 3D Part Bodies - System" at -3266.96,-1290 h100
  text ".GM2 - Board Dimensions" at -3266.96,-1390 h100
  text ".GM3 - Single Board Fabrication Notes" at -3266.96,-1490 h100
  text ".GM4 - Single Board Score/Tab Route" at -3266.96,-1590 h100
  text ".GM13 - 3D Body Alt" at -3266.96,-1690 h100
  text ".GM15 - Assembly Outlines - Top" at -3266.96,-1790 h100
  text ".GM20 - Panel Dimensions" at -3266.96,-1890 h100
  text ".GM21 - Panel Score/Tab Route" at -3266.96,-1990 h100
  text ".GM22 - Panel Dimensions" at -3266.96,-2090 h100
  text ".TXT/.DRL - NC-Drill" at -3266.96,-2290 h100
Generic Top Title Block:
  lines w0: 6414.83,-2489.5 4021.83,-2489.5 4021.83,-1899.69 6414.83,-1899.69
  lines w8: 4719.78,-2489.5 4719.78,-1899.69 ; 4719.78,-2292.9 6414.83,-2292.9 ; 4719.78,-2096.29 6414.83,-2096.29 ; 5268.18,-2292.9 5268.18,-2096.29 ; 6414.83,-2489.5 4021.83,-2489.5 4021.83,-1899.69 6414.83,-1899.69
  lines w10: -3485,-1590 -3385,-1590 ; -3485,-590 -3385,-590 -3385,410 -3485,410 ; -3485,1410 -3385,1410 ; -3485,2410 -3385,2410 ; -3485,3410 -3385,3410 ; -3485,4410 -3385,4410 ; -2485,-2590 -2485,-2490 ; -2485,4810 -2485,4910 ; -1485,-2590 -1485,-2490 ; -1485,4810 -1485,4910 ; -485,-2590 -485,-2490 ; -485,4810 -485,4910 ; 515,-2590 515,-2490 ; 515,4810 515,4910 ; 1515,-2590 1515,-2490 ; 1515,4810 1515,4910 ; 2515,-2590 2515,-2490 ; 2515,4810 2515,4910 ; 3515,-2590 3515,-2490 ; 3515,4810 3515,4910 ; 4515,-2590 4515,-2490 ; 4515,4810 4515,4910 ; 5515,-2590 5515,-2490 ; 5515,4810 5515,4910 ; 6414.83,-2489.5 6414.83,-1899.69 ; 6415,-1590 6515,-1590 ; 6415,-590 6515,-590 6515,410 6415,410 ; 6415,1410 6515,1410 ; 6415,2410 6515,2410 ; 6415,3410 6515,3410 ; 6415,4410 6515,4410 ; 6515,-2490 6515,-2590 ; 6515,-2590 -3485,-2590 -3485,4910 6515,4910 6515,-2590 ; -3385,-2490 6415,-2490 6415,4810 -3385,4810 -3385,-2490
  text "1" at -3020,4830 h60
  text "2" at -1945,4830 h60
  text "3" at -995,4830 h60
  text "4" at 55,4830 h60
  text "5" at 1005,4830 h60
  text "6" at 2030,4830 h60
  text "7" at 2980,4830 h60
  text "8" at 3955,4830 h60
  text "9" at 5055,4830 h60
  text "10" at 6005,4830 h60
  text "H" at -3470,4575 h60
  text "H" at 6435,4570 h60
  text "G" at -3470,3850 h60
  text "G" at 6435,3845 h60
  text "F" at -3460,2865 h60
  text "F" at 6445,2860 h60
  text "E" at -3470,1900 h60
  text "E" at 6435,1895 h60
  text "D" at -3470,900 h60
  text "D" at 6435,895 h60
  text "C" at -3460,-70 h60
  text "C" at 6445,-75 h60
  text "B" at -3465,-1115 h60
  text "B" at 6440,-1120 h60
  text ".PCB_TITLE" at 4769,-2037 h60
  text "" at 4520.37,-2051.77 h60
  text "" at 4602.48,-2051.77 h60
  text "A" at -3460,-2115 h60
  text "A" at 6445,-2120 h60
  text "R" at 4769.64,-2245.4 h60
  text "e" at 4824.38,-2245.4 h60
  text "v" at 4879.13,-2245.4 h60
  text ":" at 4933.87,-2245.4 h60
  text "2" at 4071.68,-2252.46 h60
  text ".PCB_VERSION" at 4997,-2253 h60
  text ".ENGINEER" at 5325,-2254 h60
  text "" at 4271.1,-2264.56 h60
  text "" at 4421.65,-2264.56 h60
  text "W" at 4071.68,-2343.7 h60
  text "a" at 4153.8,-2343.7 h60
  text "v" at 4208.54,-2343.7 h60
  text "e" at 4263.29,-2343.7 h60
  text "n" at 4318.03,-2343.7 h60
  text "u" at 4372.78,-2343.7 h60
  text "m" at 4427.52,-2343.7 h60
  text "b" at 4509.64,-2343.7 h60
  text "e" at 4564.38,-2343.7 h60
  text "r" at 4619.13,-2343.7 h60
  text ".GERBER_GEN_DATE" at 4754,-2438 h60
  text "T" at 4071.68,-2442 h60
  text "e" at 4126.42,-2442 h60
  text "c" at 4181.17,-2442 h60
  text "h" at 4222.23,-2442 h60
  text "n" at 4276.97,-2442 h60
  text "o" at 4331.72,-2442 h60
  text "l" at 4386.46,-2442 h60
  text "o" at 4413.84,-2442 h60
  text "g" at 4468.58,-2442 h60
  text "i" at 4523.33,-2442 h60
  text "e" at 4550.7,-2442 h60
  text "s" at 4605.44,-2442 h60
  text "1" at -3010,-2565 h60
  text "2" at -1935,-2565 h60
  text "3" at -985,-2565 h60
  text "4" at 65,-2565 h60
  text "5" at 1015,-2565 h60
  text "6" at 2040,-2565 h60
  text "7" at 2990,-2565 h60
  text "8" at 3965,-2565 h60
  text "9" at 5065,-2565 h60
  text "10" at 6015,-2565 h60
PCB Notes Title Block:
  lines w0: 6414.83,-2489.5 4021.83,-2489.5 4021.83,-1899.69 6414.83,-1899.69
  lines w8: 4719.78,-2489.5 4719.78,-1899.69 ; 4719.78,-2292.9 6414.83,-2292.9 ; 4719.78,-2096.29 6414.83,-2096.29 ; 5268.18,-2292.9 5268.18,-2096.29 ; 6414.83,-2489.5 4021.83,-2489.5 4021.83,-1899.69 6414.83,-1899.69
  lines w10: -3485,-1590 -3385,-1590 ; -3485,-590 -3385,-590 -3385,410 -3485,410 ; -3485,1410 -3385,1410 ; -3485,2410 -3385,2410 ; -3485,3410 -3385,3410 ; -3485,4410 -3385,4410 ; -2485,-2590 -2485,-2490 ; -2485,4810 -2485,4910 ; -1485,-2590 -1485,-2490 ; -1485,4810 -1485,4910 ; -485,-2590 -485,-2490 ; -485,4810 -485,4910 ; 515,-2590 515,-2490 ; 515,4810 515,4910 ; 1515,-2590 1515,-2490 ; 1515,4810 1515,4910 ; 2515,-2590 2515,-2490 ; 2515,4810 2515,4910 ; 3515,-2590 3515,-2490 ; 3515,4810 3515,4910 ; 4515,-2590 4515,-2490 ; 4515,4810 4515,4910 ; 5515,-2590 5515,-2490 ; 5515,4810 5515,4910 ; 6414.83,-2489.5 6414.83,-1899.69 ; 6415,-1590 6515,-1590 ; 6415,-590 6515,-590 6515,410 6415,410 ; 6415,1410 6515,1410 ; 6415,2410 6515,2410 ; 6415,3410 6515,3410 ; 6415,4410 6515,4410 ; 6515,-2490 6515,-2590 ; 6515,-2590 -3485,-2590 -3485,4910 6515,4910 6515,-2590 ; -3385,-2490 6415,-2490 6415,4810 -3385,4810 -3385,-2490
  text "1" at -3020,4830 h60
  text "2" at -1945,4830 h60
  text "3" at -995,4830 h60
  text "4" at 55,4830 h60
  text "5" at 1005,4830 h60
  text "6" at 2030,4830 h60
  text "7" at 2980,4830 h60
  text "8" at 3955,4830 h60
  text "9" at 5055,4830 h60
  text "10" at 6005,4830 h60
  text "H" at -3470,4575 h60
  text "H" at 6435,4570 h60
  text "G" at -3470,3850 h60
  text "G" at 6435,3845 h60
  text "F" at -3460,2865 h60
  text "F" at 6445,2860 h60
  text "E" at -3470,1900 h60
  text "E" at 6435,1895 h60
  text "D" at -3470,900 h60
  text "D" at 6435,895 h60
  text "C" at -3460,-70 h60
  text "C" at 6445,-75 h60
  text "B" at -3465,-1115 h60
  text "B" at 6440,-1120 h60
  text ".PCB_TITLE" at 4769,-2037 h60
  text "" at 4520.37,-2051.77 h60
  text "" at 4602.48,-2051.77 h60
  text "A" at -3460,-2115 h60
  text "A" at 6445,-2120 h60
  text "R" at 4769.64,-2245.4 h60
  text "e" at 4824.38,-2245.4 h60
  text "v" at 4879.13,-2245.4 h60
  text ":" at 4933.87,-2245.4 h60
  text "2" at 4071.68,-2252.46 h60
  text ".PCB_VERSION" at 4997,-2253 h60
  text ".ENGINEER" at 5325,-2254 h60
  text "" at 4271.1,-2264.56 h60
  text "" at 4421.65,-2264.56 h60
  text "W" at 4071.68,-2343.7 h60
  text "a" at 4153.8,-2343.7 h60
  text "v" at 4208.54,-2343.7 h60
  text "e" at 4263.29,-2343.7 h60
  text "n" at 4318.03,-2343.7 h60
  text "u" at 4372.78,-2343.7 h60
  text "m" at 4427.52,-2343.7 h60
  text "b" at 4509.64,-2343.7 h60
  text "e" at 4564.38,-2343.7 h60
  text "r" at 4619.13,-2343.7 h60
  text ".GERBER_GEN_DATE" at 4754,-2438 h60
  text "T" at 4071.68,-2442 h60
  text "e" at 4126.42,-2442 h60
  text "c" at 4181.17,-2442 h60
  text "h" at 4222.23,-2442 h60
  text "n" at 4276.97,-2442 h60
  text "o" at 4331.72,-2442 h60
  text "l" at 4386.46,-2442 h60
  text "o" at 4413.84,-2442 h60
  text "g" at 4468.58,-2442 h60
  text "i" at 4523.33,-2442 h60
  text "e" at 4550.7,-2442 h60
  text "s" at 4605.44,-2442 h60
  text "1" at -3010,-2565 h60
  text "2" at -1935,-2565 h60
  text "3" at -985,-2565 h60
  text "4" at 65,-2565 h60
  text "5" at 1015,-2565 h60
  text "6" at 2040,-2565 h60
  text "7" at 2990,-2565 h60
  text "8" at 3965,-2565 h60
  text "9" at 5065,-2565 h60
  text "10" at 6015,-2565 h60
PCB Notes:
  text "Layer Details" at -3200,940 h60
  text ".GTL" at -3150,440 h60
  text "Top Copper" at -2200,440 h60
  text ".GBL" at -3150,240 h60
  text "Bottom Copper" at -2200,240 h60
  text ".GTO" at -3150,-1110 h60
  text "Top Silkscreen" at -2150,-1110 h60
  text ".GBO" at -3150,-1310 h60
  text "Bottom Silkscreen" at -2150,-1310 h60
  text ".GTS" at -3150,-1660 h60
  text "Top Soldermask" at -2150,-1660 h60
  text ".GBS" at -3150,-1860 h60
  text "Bottom Soldermask" at -2150,-1860 h60
  text ".TXT" at -3150,-2060 h60
  text "NC-DRILL" at -2150,-2060 h60
Fabrication Reference  Title Block:
  lines w0: 6414.83,-2489.5 4021.83,-2489.5 4021.83,-1899.69 6414.83,-1899.69
  lines w8: 4719.78,-2489.5 4719.78,-1899.69 ; 4719.78,-2292.9 6414.83,-2292.9 ; 4719.78,-2096.29 6414.83,-2096.29 ; 5268.18,-2292.9 5268.18,-2096.29 ; 6414.83,-2489.5 4021.83,-2489.5 4021.83,-1899.69 6414.83,-1899.69
  lines w10: -3485,-1590 -3385,-1590 ; -3485,-590 -3385,-590 -3385,410 -3485,410 ; -3485,1410 -3385,1410 ; -3485,2410 -3385,2410 ; -3485,3410 -3385,3410 ; -3485,4410 -3385,4410 ; -2485,-2590 -2485,-2490 ; -2485,4810 -2485,4910 ; -1485,-2590 -1485,-2490 ; -1485,4810 -1485,4910 ; -485,-2590 -485,-2490 ; -485,4810 -485,4910 ; 515,-2590 515,-2490 ; 515,4810 515,4910 ; 1515,-2590 1515,-2490 ; 1515,4810 1515,4910 ; 2515,-2590 2515,-2490 ; 2515,4810 2515,4910 ; 3515,-2590 3515,-2490 ; 3515,4810 3515,4910 ; 4515,-2590 4515,-2490 ; 4515,4810 4515,4910 ; 5515,-2590 5515,-2490 ; 5515,4810 5515,4910 ; 6414.83,-2489.5 6414.83,-1899.69 ; 6415,-1590 6515,-1590 ; 6415,-590 6515,-590 6515,410 6415,410 ; 6415,1410 6515,1410 ; 6415,2410 6515,2410 ; 6415,3410 6515,3410 ; 6415,4410 6515,4410 ; 6515,-2490 6515,-2590 ; 6515,-2590 -3485,-2590 -3485,4910 6515,4910 6515,-2590 ; -3385,-2490 6415,-2490 6415,4810 -3385,4810 -3385,-2490
  text "1" at -3020,4830 h60
  text "2" at -1945,4830 h60
  text "3" at -995,4830 h60
  text "4" at 55,4830 h60
  text "5" at 1005,4830 h60
  text "6" at 2030,4830 h60
  text "7" at 2980,4830 h60
  text "8" at 3955,4830 h60
  text "9" at 5055,4830 h60
  text "10" at 6005,4830 h60
  text "H" at -3470,4575 h60
  text "H" at 6435,4570 h60
  text "Fabrication Reference Drawing" at -1800,4390 h60
  text "G" at -3470,3850 h60
  text "G" at 6435,3845 h60
  text "F" at -3460,2865 h60
  text "F" at 6445,2860 h60
  text "E" at -3470,1900 h60
  text "E" at 6435,1895 h60
  text "D" at -3470,900 h60
  text "D" at 6435,895 h60
  text "C" at -3460,-70 h60
  text "C" at 6445,-75 h60
  text "B" at -3465,-1115 h60
  text "B" at 6440,-1120 h60
  text ".PCB_TITLE" at 4769,-2037 h60
  text "" at 4520.37,-2051.77 h60
  text "" at 4602.48,-2051.77 h60
  text "A" at -3460,-2115 h60
  text "A" at 6445,-2120 h60
  text "R" at 4769.64,-2245.4 h60
  text "e" at 4824.38,-2245.4 h60
  text "v" at 4879.13,-2245.4 h60
  text ":" at 4933.87,-2245.4 h60
  text "2" at 4071.68,-2252.46 h60
  text ".PCB_VERSION" at 4997,-2253 h60
  text ".ENGINEER" at 5325,-2254 h60
  text "" at 4271.1,-2264.56 h60
  text "" at 4421.65,-2264.56 h60
  text "W" at 4071.68,-2343.7 h60
  text "a" at 4153.8,-2343.7 h60
  text "v" at 4208.54,-2343.7 h60
  text "e" at 4263.29,-2343.7 h60
  text "n" at 4318.03,-2343.7 h60
  text "u" at 4372.78,-2343.7 h60
  text "m" at 4427.52,-2343.7 h60
  text "b" at 4509.64,-2343.7 h60
  text "e" at 4564.38,-2343.7 h60
  text "r" at 4619.13,-2343.7 h60
  text ".GERBER_GEN_DATE" at 4754,-2438 h60
  text "T" at 4071.68,-2442 h60
  text "e" at 4126.42,-2442 h60
  text "c" at 4181.17,-2442 h60
  text "h" at 4222.23,-2442 h60
  text "n" at 4276.97,-2442 h60
  text "o" at 4331.72,-2442 h60
  text "l" at 4386.46,-2442 h60
  text "o" at 4413.84,-2442 h60
  text "g" at 4468.58,-2442 h60
  text "i" at 4523.33,-2442 h60
  text "e" at 4550.7,-2442 h60
  text "s" at 4605.44,-2442 h60
  text "1" at -3010,-2565 h60
  text "2" at -1935,-2565 h60
  text "3" at -985,-2565 h60
  text "4" at 65,-2565 h60
  text "5" at 1015,-2565 h60
  text "6" at 2040,-2565 h60
  text "7" at 2990,-2565 h60
  text "8" at 3965,-2565 h60
  text "9" at 5065,-2565 h60
  text "10" at 6015,-2565 h60
Board Outline:
  lines w30: -1000,-200 2593,-200 2593,1800 -1000,1800 -1000,-200